# EAGLE board sidepanel (EAGLE 5.10)
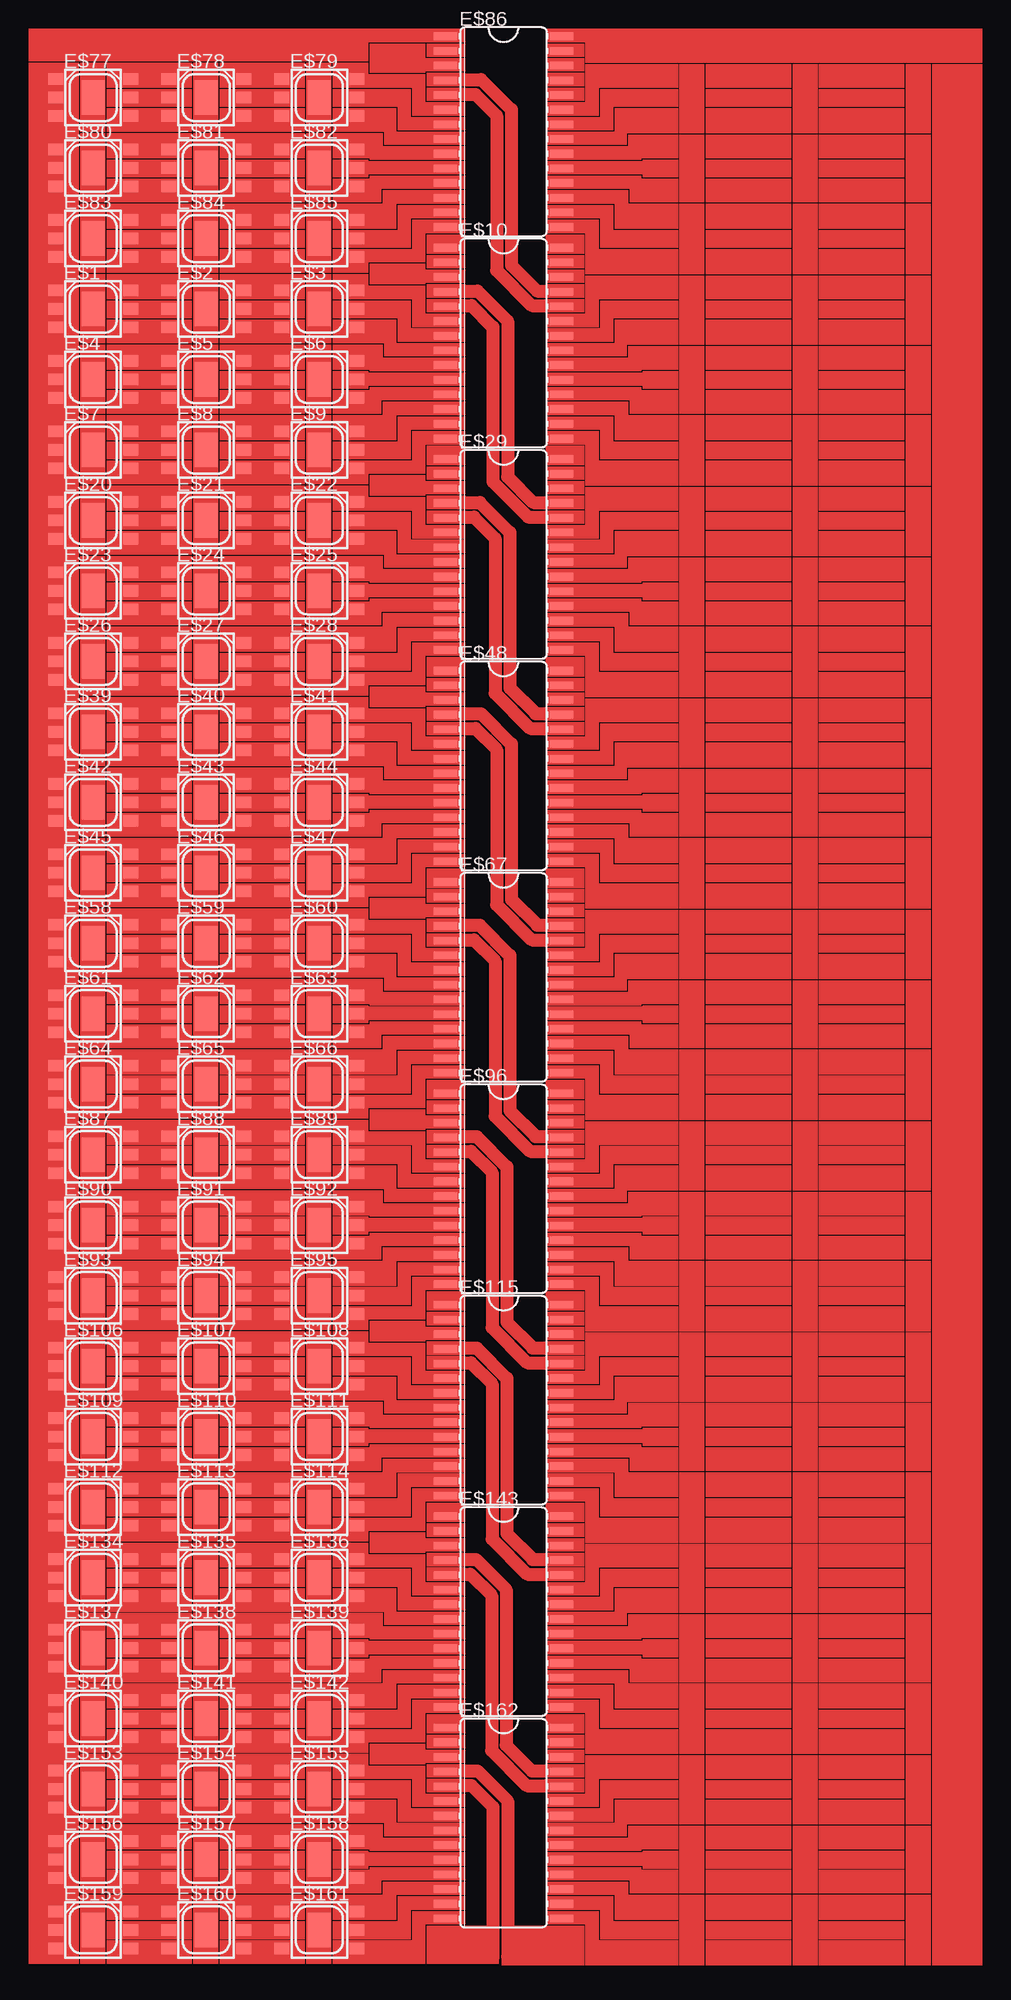
[diagram p0: board, top side]
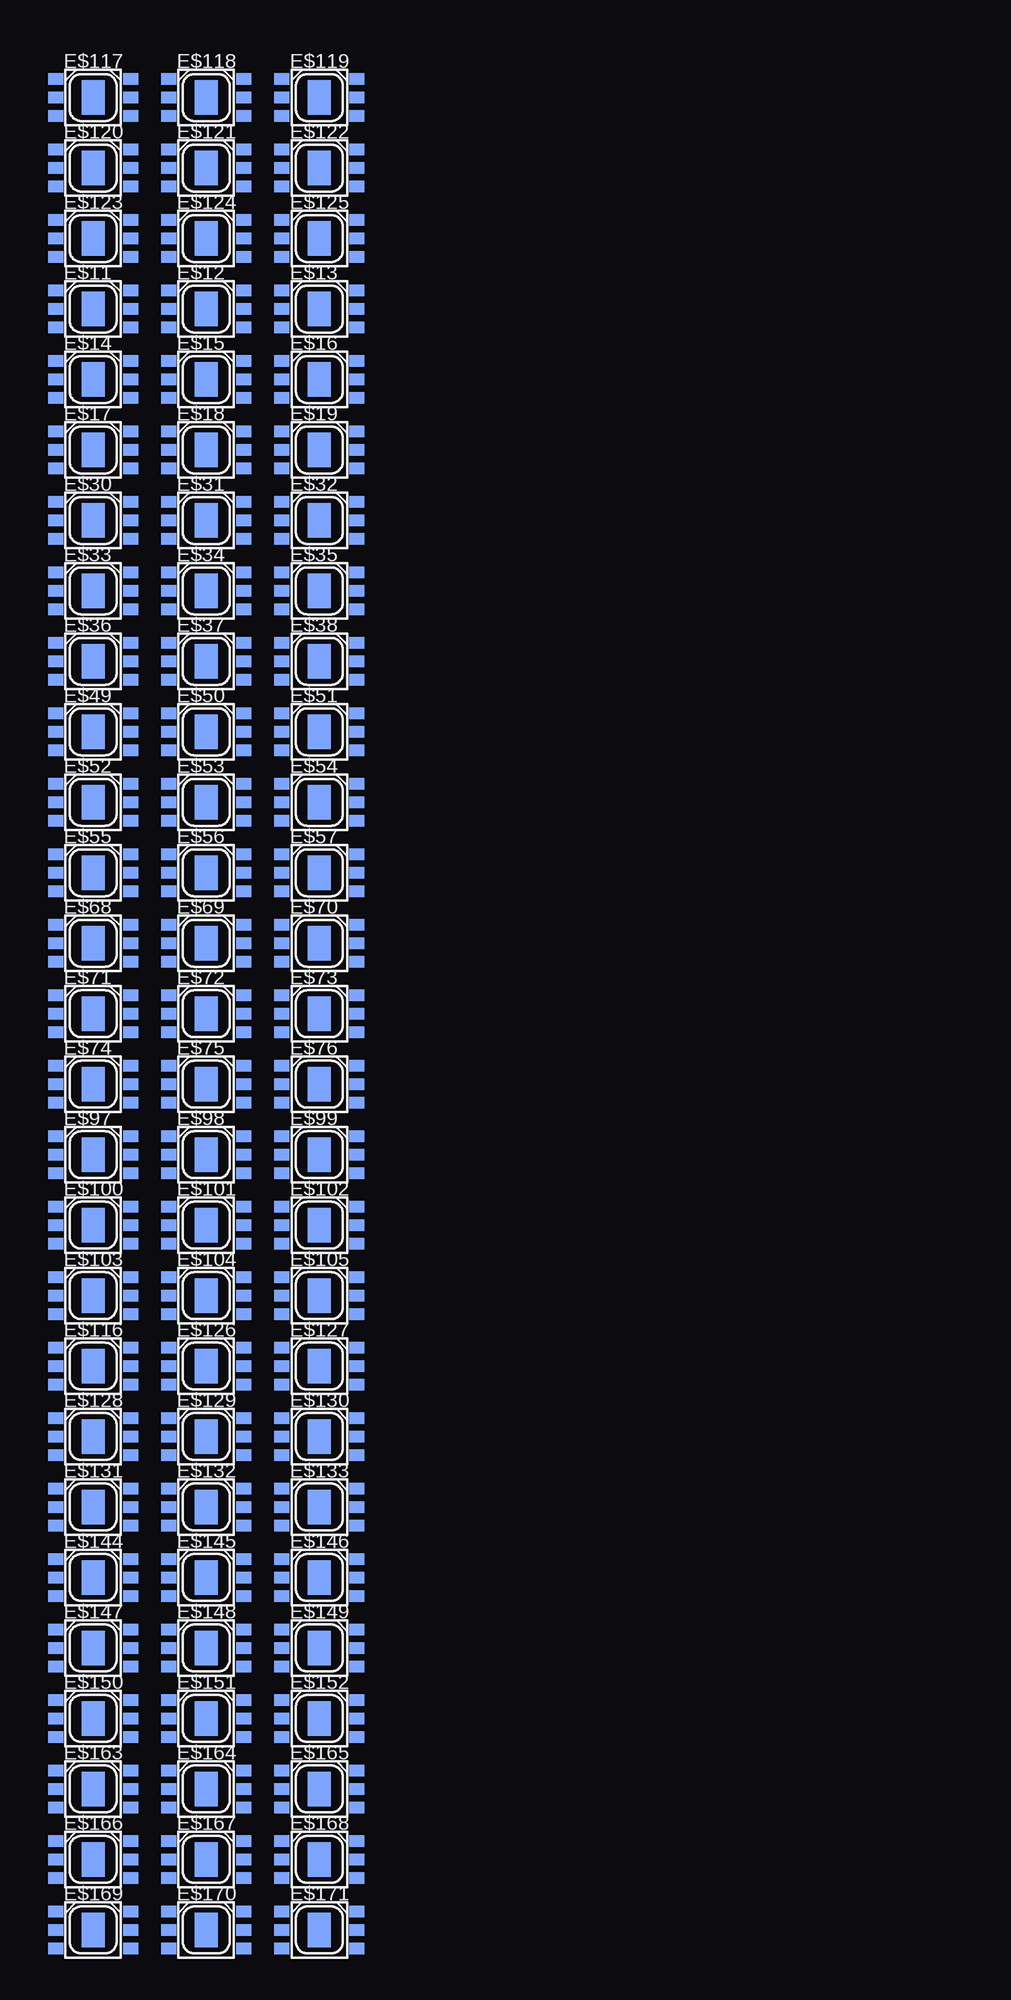
[diagram p1: board, bottom side, seen from below]

No outline drawn. Coordinates in mm, seen from the top.
Copper layers (1*16): Top 0.035mm / dielectric 1.5mm / Bottom 0.035mm
Design rules "default": minimum track width 10mil, minimum drill 24mil, track to track 8mil, track to pad 8mil, pad to pad 8mil, via to via 8mil, smd to smd 8mil, copper to edge 40mil, drill to drill 8mil, minimum pad ring 10mil, minimum via ring 8mil, stop-mask expansion 4mil, vias tented up to drill 0mil, thermal gap 10mil

## Footprints (pad centres in the part's own frame; a part is rotated, then mirrored left to right if it is on the bottom)
LP2C63-ST-RGB-SR0 = smd 1.3 x 1: 1 -3.25,1.6; 2 -3.25,0; 3 -3.25,-1.6; 4 3.25,-1.6; 5 3.25,0; 6 3.25,1.6 | smd 2 x 3: TH 0,0
SO28W = smd 0.66 x 2.032: 1 -8.255,-5.029; 2 -6.985,-5.029; 3 -5.715,-5.029; 4 -4.445,-5.029; 5 -3.175,-5.029; 6 -1.905,-5.029; 7 -0.635,-5.029; 8 0.635,-5.029; 9 1.905,-5.029; 10 3.175,-5.029; 11 4.445,-5.029; 12 5.715,-5.029; 13 6.985,-5.029; 14 8.255,-5.029; 15 8.255,5.029; 16 6.985,5.029; 17 5.715,5.029; 18 4.445,5.029; 19 3.175,5.029; 20 1.905,5.029; 21 0.635,5.029; 22 -0.635,5.029; 23 -1.905,5.029; 24 -3.175,5.029; 25 -4.445,5.029; 26 -5.715,5.029; 27 -6.985,5.029; 28 -8.255,5.029

## Placement (x,y rotation side)
E$1  [LP2C63-ST-RGB-SR0]  5.55,143.16 0 top
E$2  [LP2C63-ST-RGB-SR0]  15.33,143.16 0 top
E$3  [LP2C63-ST-RGB-SR0]  25.11,143.16 0 top
E$4  [LP2C63-ST-RGB-SR0]  5.55,137.06 0 top
E$5  [LP2C63-ST-RGB-SR0]  15.33,137.06 0 top
E$6  [LP2C63-ST-RGB-SR0]  25.11,137.06 0 top
E$7  [LP2C63-ST-RGB-SR0]  5.55,130.97 0 top
E$8  [LP2C63-ST-RGB-SR0]  15.33,130.97 0 top
E$9  [LP2C63-ST-RGB-SR0]  25.11,130.97 0 top
E$10  [SO28W]  41.04,140.2 270 top
E$11  [LP2C63-ST-RGB-SR0]  76.87,143.16 0 bottom
E$12  [LP2C63-ST-RGB-SR0]  67.09,143.16 0 bottom
E$13  [LP2C63-ST-RGB-SR0]  57.31,143.16 0 bottom
E$14  [LP2C63-ST-RGB-SR0]  76.87,137.06 0 bottom
E$15  [LP2C63-ST-RGB-SR0]  67.09,137.06 0 bottom
E$16  [LP2C63-ST-RGB-SR0]  57.31,137.06 0 bottom
E$17  [LP2C63-ST-RGB-SR0]  76.87,130.97 0 bottom
E$18  [LP2C63-ST-RGB-SR0]  67.09,130.97 0 bottom
E$19  [LP2C63-ST-RGB-SR0]  57.31,130.97 0 bottom
E$20  [LP2C63-ST-RGB-SR0]  5.55,124.87 0 top
E$21  [LP2C63-ST-RGB-SR0]  15.33,124.87 0 top
E$22  [LP2C63-ST-RGB-SR0]  25.11,124.87 0 top
E$23  [LP2C63-ST-RGB-SR0]  5.55,118.77 0 top
E$24  [LP2C63-ST-RGB-SR0]  15.33,118.77 0 top
E$25  [LP2C63-ST-RGB-SR0]  25.11,118.77 0 top
E$26  [LP2C63-ST-RGB-SR0]  5.55,112.68 0 top
E$27  [LP2C63-ST-RGB-SR0]  15.33,112.68 0 top
E$28  [LP2C63-ST-RGB-SR0]  25.11,112.68 0 top
E$29  [SO28W]  41.04,121.92 270 top
E$30  [LP2C63-ST-RGB-SR0]  76.87,124.87 0 bottom
E$31  [LP2C63-ST-RGB-SR0]  67.09,124.87 0 bottom
E$32  [LP2C63-ST-RGB-SR0]  57.31,124.87 0 bottom
E$33  [LP2C63-ST-RGB-SR0]  76.87,118.77 0 bottom
E$34  [LP2C63-ST-RGB-SR0]  67.09,118.77 0 bottom
E$35  [LP2C63-ST-RGB-SR0]  57.31,118.77 0 bottom
E$36  [LP2C63-ST-RGB-SR0]  76.87,112.68 0 bottom
E$37  [LP2C63-ST-RGB-SR0]  67.09,112.68 0 bottom
E$38  [LP2C63-ST-RGB-SR0]  57.31,112.68 0 bottom
E$39  [LP2C63-ST-RGB-SR0]  5.55,106.58 0 top
E$40  [LP2C63-ST-RGB-SR0]  15.33,106.58 0 top
E$41  [LP2C63-ST-RGB-SR0]  25.11,106.58 0 top
E$42  [LP2C63-ST-RGB-SR0]  5.55,100.48 0 top
E$43  [LP2C63-ST-RGB-SR0]  15.33,100.48 0 top
E$44  [LP2C63-ST-RGB-SR0]  25.11,100.48 0 top
E$45  [LP2C63-ST-RGB-SR0]  5.55,94.39 0 top
E$46  [LP2C63-ST-RGB-SR0]  15.33,94.39 0 top
E$47  [LP2C63-ST-RGB-SR0]  25.11,94.39 0 top
E$48  [SO28W]  41.04,103.63 270 top
E$49  [LP2C63-ST-RGB-SR0]  76.87,106.58 0 bottom
E$50  [LP2C63-ST-RGB-SR0]  67.09,106.58 0 bottom
E$51  [LP2C63-ST-RGB-SR0]  57.31,106.58 0 bottom
E$52  [LP2C63-ST-RGB-SR0]  76.87,100.48 0 bottom
E$53  [LP2C63-ST-RGB-SR0]  67.09,100.48 0 bottom
E$54  [LP2C63-ST-RGB-SR0]  57.31,100.48 0 bottom
E$55  [LP2C63-ST-RGB-SR0]  76.87,94.39 0 bottom
E$56  [LP2C63-ST-RGB-SR0]  67.09,94.39 0 bottom
E$57  [LP2C63-ST-RGB-SR0]  57.31,94.39 0 bottom
E$58  [LP2C63-ST-RGB-SR0]  5.55,88.29 0 top
E$59  [LP2C63-ST-RGB-SR0]  15.33,88.29 0 top
E$60  [LP2C63-ST-RGB-SR0]  25.11,88.29 0 top
E$61  [LP2C63-ST-RGB-SR0]  5.55,82.2 0 top
E$62  [LP2C63-ST-RGB-SR0]  15.33,82.2 0 top
E$63  [LP2C63-ST-RGB-SR0]  25.11,82.2 0 top
E$64  [LP2C63-ST-RGB-SR0]  5.55,76.1 0 top
E$65  [LP2C63-ST-RGB-SR0]  15.33,76.1 0 top
E$66  [LP2C63-ST-RGB-SR0]  25.11,76.1 0 top
E$67  [SO28W]  41.04,85.34 270 top
E$68  [LP2C63-ST-RGB-SR0]  76.87,88.29 0 bottom
E$69  [LP2C63-ST-RGB-SR0]  67.09,88.29 0 bottom
E$70  [LP2C63-ST-RGB-SR0]  57.31,88.29 0 bottom
E$71  [LP2C63-ST-RGB-SR0]  76.87,82.2 0 bottom
E$72  [LP2C63-ST-RGB-SR0]  67.09,82.2 0 bottom
E$73  [LP2C63-ST-RGB-SR0]  57.31,82.2 0 bottom
E$74  [LP2C63-ST-RGB-SR0]  76.87,76.1 0 bottom
E$75  [LP2C63-ST-RGB-SR0]  67.09,76.1 0 bottom
E$76  [LP2C63-ST-RGB-SR0]  57.31,76.1 0 bottom
E$77  [LP2C63-ST-RGB-SR0]  5.55,161.44 0 top
E$78  [LP2C63-ST-RGB-SR0]  15.33,161.44 0 top
E$79  [LP2C63-ST-RGB-SR0]  25.11,161.44 0 top
E$80  [LP2C63-ST-RGB-SR0]  5.55,155.35 0 top
E$81  [LP2C63-ST-RGB-SR0]  15.33,155.35 0 top
E$82  [LP2C63-ST-RGB-SR0]  25.11,155.35 0 top
E$83  [LP2C63-ST-RGB-SR0]  5.55,149.25 0 top
E$84  [LP2C63-ST-RGB-SR0]  15.33,149.25 0 top
E$85  [LP2C63-ST-RGB-SR0]  25.11,149.25 0 top
E$86  [SO28W]  41.04,158.49 270 top
E$87  [LP2C63-ST-RGB-SR0]  5.55,70 0 top
E$88  [LP2C63-ST-RGB-SR0]  15.33,70 0 top
E$89  [LP2C63-ST-RGB-SR0]  25.11,70 0 top
E$90  [LP2C63-ST-RGB-SR0]  5.55,63.91 0 top
E$91  [LP2C63-ST-RGB-SR0]  15.33,63.91 0 top
E$92  [LP2C63-ST-RGB-SR0]  25.11,63.91 0 top
E$93  [LP2C63-ST-RGB-SR0]  5.55,57.81 0 top
E$94  [LP2C63-ST-RGB-SR0]  15.33,57.81 0 top
E$95  [LP2C63-ST-RGB-SR0]  25.11,57.81 0 top
E$96  [SO28W]  41.04,67.05 270 top
E$97  [LP2C63-ST-RGB-SR0]  76.87,70 0 bottom
E$98  [LP2C63-ST-RGB-SR0]  67.09,70 0 bottom
E$99  [LP2C63-ST-RGB-SR0]  57.31,70 0 bottom
E$100  [LP2C63-ST-RGB-SR0]  76.87,63.91 0 bottom
E$101  [LP2C63-ST-RGB-SR0]  67.09,63.91 0 bottom
E$102  [LP2C63-ST-RGB-SR0]  57.31,63.91 0 bottom
E$103  [LP2C63-ST-RGB-SR0]  76.87,57.81 0 bottom
E$104  [LP2C63-ST-RGB-SR0]  67.09,57.81 0 bottom
E$105  [LP2C63-ST-RGB-SR0]  57.31,57.81 0 bottom
E$106  [LP2C63-ST-RGB-SR0]  5.55,51.72 0 top
E$107  [LP2C63-ST-RGB-SR0]  15.33,51.72 0 top
E$108  [LP2C63-ST-RGB-SR0]  25.11,51.72 0 top
E$109  [LP2C63-ST-RGB-SR0]  5.55,45.62 0 top
E$110  [LP2C63-ST-RGB-SR0]  15.33,45.62 0 top
E$111  [LP2C63-ST-RGB-SR0]  25.11,45.62 0 top
E$112  [LP2C63-ST-RGB-SR0]  5.55,39.52 0 top
E$113  [LP2C63-ST-RGB-SR0]  15.33,39.52 0 top
E$114  [LP2C63-ST-RGB-SR0]  25.11,39.52 0 top
E$115  [SO28W]  41.04,48.76 270 top
E$116  [LP2C63-ST-RGB-SR0]  76.87,51.72 0 bottom
E$117  [LP2C63-ST-RGB-SR0]  76.87,161.44 0 bottom
E$118  [LP2C63-ST-RGB-SR0]  67.09,161.44 0 bottom
E$119  [LP2C63-ST-RGB-SR0]  57.31,161.44 0 bottom
E$120  [LP2C63-ST-RGB-SR0]  76.87,155.35 0 bottom
E$121  [LP2C63-ST-RGB-SR0]  67.09,155.35 0 bottom
E$122  [LP2C63-ST-RGB-SR0]  57.31,155.35 0 bottom
E$123  [LP2C63-ST-RGB-SR0]  76.87,149.25 0 bottom
E$124  [LP2C63-ST-RGB-SR0]  67.09,149.25 0 bottom
E$125  [LP2C63-ST-RGB-SR0]  57.31,149.25 0 bottom
E$126  [LP2C63-ST-RGB-SR0]  67.09,51.72 0 bottom
E$127  [LP2C63-ST-RGB-SR0]  57.31,51.72 0 bottom
E$128  [LP2C63-ST-RGB-SR0]  76.87,45.62 0 bottom
E$129  [LP2C63-ST-RGB-SR0]  67.09,45.62 0 bottom
E$130  [LP2C63-ST-RGB-SR0]  57.31,45.62 0 bottom
E$131  [LP2C63-ST-RGB-SR0]  76.87,39.52 0 bottom
E$132  [LP2C63-ST-RGB-SR0]  67.09,39.52 0 bottom
E$133  [LP2C63-ST-RGB-SR0]  57.31,39.52 0 bottom
E$134  [LP2C63-ST-RGB-SR0]  5.55,33.43 0 top
E$135  [LP2C63-ST-RGB-SR0]  15.33,33.43 0 top
E$136  [LP2C63-ST-RGB-SR0]  25.11,33.43 0 top
E$137  [LP2C63-ST-RGB-SR0]  5.55,27.33 0 top
E$138  [LP2C63-ST-RGB-SR0]  15.33,27.33 0 top
E$139  [LP2C63-ST-RGB-SR0]  25.11,27.33 0 top
E$140  [LP2C63-ST-RGB-SR0]  5.55,21.24 0 top
E$141  [LP2C63-ST-RGB-SR0]  15.33,21.24 0 top
E$142  [LP2C63-ST-RGB-SR0]  25.11,21.24 0 top
E$143  [SO28W]  41.04,30.48 270 top
E$144  [LP2C63-ST-RGB-SR0]  76.87,33.43 0 bottom
E$145  [LP2C63-ST-RGB-SR0]  67.09,33.43 0 bottom
E$146  [LP2C63-ST-RGB-SR0]  57.31,33.43 0 bottom
E$147  [LP2C63-ST-RGB-SR0]  76.87,27.33 0 bottom
E$148  [LP2C63-ST-RGB-SR0]  67.09,27.33 0 bottom
E$149  [LP2C63-ST-RGB-SR0]  57.31,27.33 0 bottom
E$150  [LP2C63-ST-RGB-SR0]  76.87,21.24 0 bottom
E$151  [LP2C63-ST-RGB-SR0]  67.09,21.24 0 bottom
E$152  [LP2C63-ST-RGB-SR0]  57.31,21.24 0 bottom
E$153  [LP2C63-ST-RGB-SR0]  5.55,15.14 0 top
E$154  [LP2C63-ST-RGB-SR0]  15.33,15.14 0 top
E$155  [LP2C63-ST-RGB-SR0]  25.11,15.14 0 top
E$156  [LP2C63-ST-RGB-SR0]  5.55,9.04 0 top
E$157  [LP2C63-ST-RGB-SR0]  15.33,9.04 0 top
E$158  [LP2C63-ST-RGB-SR0]  25.11,9.04 0 top
E$159  [LP2C63-ST-RGB-SR0]  5.55,2.95 0 top
E$160  [LP2C63-ST-RGB-SR0]  15.33,2.95 0 top
E$161  [LP2C63-ST-RGB-SR0]  25.11,2.95 0 top
E$162  [SO28W]  41.04,12.19 270 top
E$163  [LP2C63-ST-RGB-SR0]  76.87,15.14 0 bottom
E$164  [LP2C63-ST-RGB-SR0]  67.09,15.14 0 bottom
E$165  [LP2C63-ST-RGB-SR0]  57.31,15.14 0 bottom
E$166  [LP2C63-ST-RGB-SR0]  76.87,9.04 0 bottom
E$167  [LP2C63-ST-RGB-SR0]  67.09,9.04 0 bottom
E$168  [LP2C63-ST-RGB-SR0]  57.31,9.04 0 bottom
E$169  [LP2C63-ST-RGB-SR0]  76.87,2.95 0 bottom
E$170  [LP2C63-ST-RGB-SR0]  67.09,2.95 0 bottom
E$171  [LP2C63-ST-RGB-SR0]  57.31,2.95 0 bottom

## Library data of the parts
E$1-E$9 E$11-E$28 E$30-E$47 E$49-E$66 E$68-E$85 E$87-E$95 E$97-E$114 E$116-E$142 E$144-E$161 E$163-E$171 = led
E$10 E$29 E$48 E$67 E$86 E$96 E$115 E$143 E$162 = linear

## Tracks (layer width: path | path; a pad name or v marks a point on that pad's centre or on a via)
S$1
  Top 1.143: 37.27,163 39.12,163 41.72,160.4 41.72,146.94 43.94,144.72 45.15,144.72
S$2
  Top 1.143: 37.47,161.73 38.61,161.73 40.45,159.89 40.45,146.49 43.5,143.45 45.15,143.45
S$3
  Top 1.143: 36.96,144.72 38.8,144.72 41.4,142.11 41.4,128.65 43.62,126.43 44.83,126.43
S$4
  Top 1.143: 37.15,143.45 38.29,143.45 40.13,141.6 40.13,128.21 43.18,125.16 44.83,125.16
S$5
  Top 1.143: 37.15,126.43 38.99,126.43 41.59,123.83 41.59,110.36 43.81,108.14 45.02,108.14
S$6
  Top 1.143: 37.34,125.16 38.48,125.16 40.32,123.32 40.32,109.92 43.37,106.87 45.02,106.87
S$9
  Top 1.143: 37.27,108.14 39.12,108.14 41.72,105.54 41.72,92.08 43.94,89.85 45.15,89.85
S$10
  Top 1.143: 37.47,106.87 38.61,106.87 40.45,105.03 40.45,91.63 43.5,88.58 45.15,88.58
S$11
  Top 1.143: 37.15,89.85 38.99,89.85 41.59,87.25 41.59,73.79 43.81,71.56 45.02,71.56
S$12
  Top 1.143: 37.34,88.58 38.48,88.58 40.32,86.74 40.32,73.34 43.37,70.29 45.02,70.29
S$13
  Top 1.143: 36.89,71.56 38.73,71.56 41.34,68.96 41.34,55.5 43.56,53.28 44.77,53.28
S$14
  Top 1.143: 37.08,70.29 38.23,70.29 40.07,68.45 40.07,55.05 43.12,52.01 44.77,52.01
S$15
  Top 1.143: 36.89,53.28 38.73,53.28 41.34,50.67 41.34,37.21 43.56,34.99 44.77,34.99
S$16
  Top 1.143: 37.08,52.01 38.23,52.01 40.07,50.16 40.07,36.77 43.12,33.72 44.77,33.72
S$17
  Top 1.143: 36.83,34.99 38.67,34.99 41.27,32.38 41.27,18.92 43.5,16.7 44.7,16.7
S$18
  Top 1.143: 37.02,33.72 38.16,33.72 40.01,31.88 40.01,18.48 43.05,15.43 44.7,15.43
S$19
  Top 1.143: 41.4,0.64 41.4,14.1 38.8,16.7 36.96,16.7
S$20
  Top 1.143: 37.15,15.43 38.29,15.43 40.13,13.59 40.13,0.57
(copper drawn outside any net)
  shapes: Top area x3440

## Text on the board
Unrouted: GND | VCC | NC | NC | NC | CKI | CKO | SDI | SDO | 0 | 17 | 1 | 16 | 2 | 15 | 3 | 14 | 4 | 13 | 5 | 12 | 6 | 11 | 7 | 10 | 8 | 9 | GND | GND | VCC | VCC | NC | NC | NC | NC | NC | CKI | CKO | SDI | SDO | 0 | 17 | 1 | 16 | 2 | 15 | 3 | 14 | 4 | 13 | 5 | 12 | 6 | 11 | 7 | 10 | 8 | 9 | GND | GND | VCC | VCC | NC | NC | NC | NC | NC | CKI | CKO | SDI | SDO | 0 | 17 | 1 | 16 | 2 | 15 | 3 | 14 | 4 | 13 | 5 | 12 | 6 | 11 | 7 | 10 | 8 | 9 | GND | GND | VCC | VCC | NC | NC | NC | NC | NC | CKI | CKO | SDI | SDO | 0 | 17 | 1 | 16 | 2 | 15 | 3 | 14 | 4 | 13 | 5 | 12 | 6 | 11 | 7 | 10 | 8 | 9 | GND | GND | VCC | VCC | NC | NC | NC | NC | NC | CKI | CKO | SDI | SDO | 0 | 17 | 1 | 16 | 2 | 15 | 3 | 14 | 4 | 13 | 5 | 12 | 6 | 11 | 7 | 10 | 8 | 9 | GND | GND | VCC | VCC | NC | NC | NC | NC | NC | CKI | CKO | SDI | SDO | 0 | 17 | 1 | 16 | 2 | 15 | 3 | 14 | 4 | 13 | 5 | 12 | 6 | 11 | 7 | 10 | 8 | 9 | GND | GND | VCC | VCC | NC | NC | NC | NC | NC | CKI | CKO | SDI | SDO | 0 | 17 | 1 | 16 | 2 | 15 | 3 | 14 | 4 | 13 | 5 | 12 | 6 | 11 | 7 | 10 | 8 | 9 | GND | GND | VCC | VCC | NC | NC | NC | NC | NC | CKI | CKO | SDI | SDO | 0 | 17 | 1 | 16 | 2 | 15 | 3 | 14 | 4 | 13 | 5 | 12 | 6 | 11 | 7 | 10 | 8 | 9 | GND | GND | GND | VCC | VCC | VCC | NC | NC | NC | NC | NC | NC | NC | CKI | CKO | SDI | SDO | 0 | 17 | 1 | 16 | 2 | 15 | 3 | 14 | 4 | 13 | 5 | 12 | 6 | 11 | 7 | 10 | 8 | 9